# Altium PCB boost.PcbDoc
Units mm, origin at the board's own origin, x right, y up, seen from the top; angles counter-clockwise.
Board outline 50.04 x 50.04 mm, 2 copper layers (Top Layer, Bottom Layer); 27 components, 16 nets, 93 pads, 33 vias.
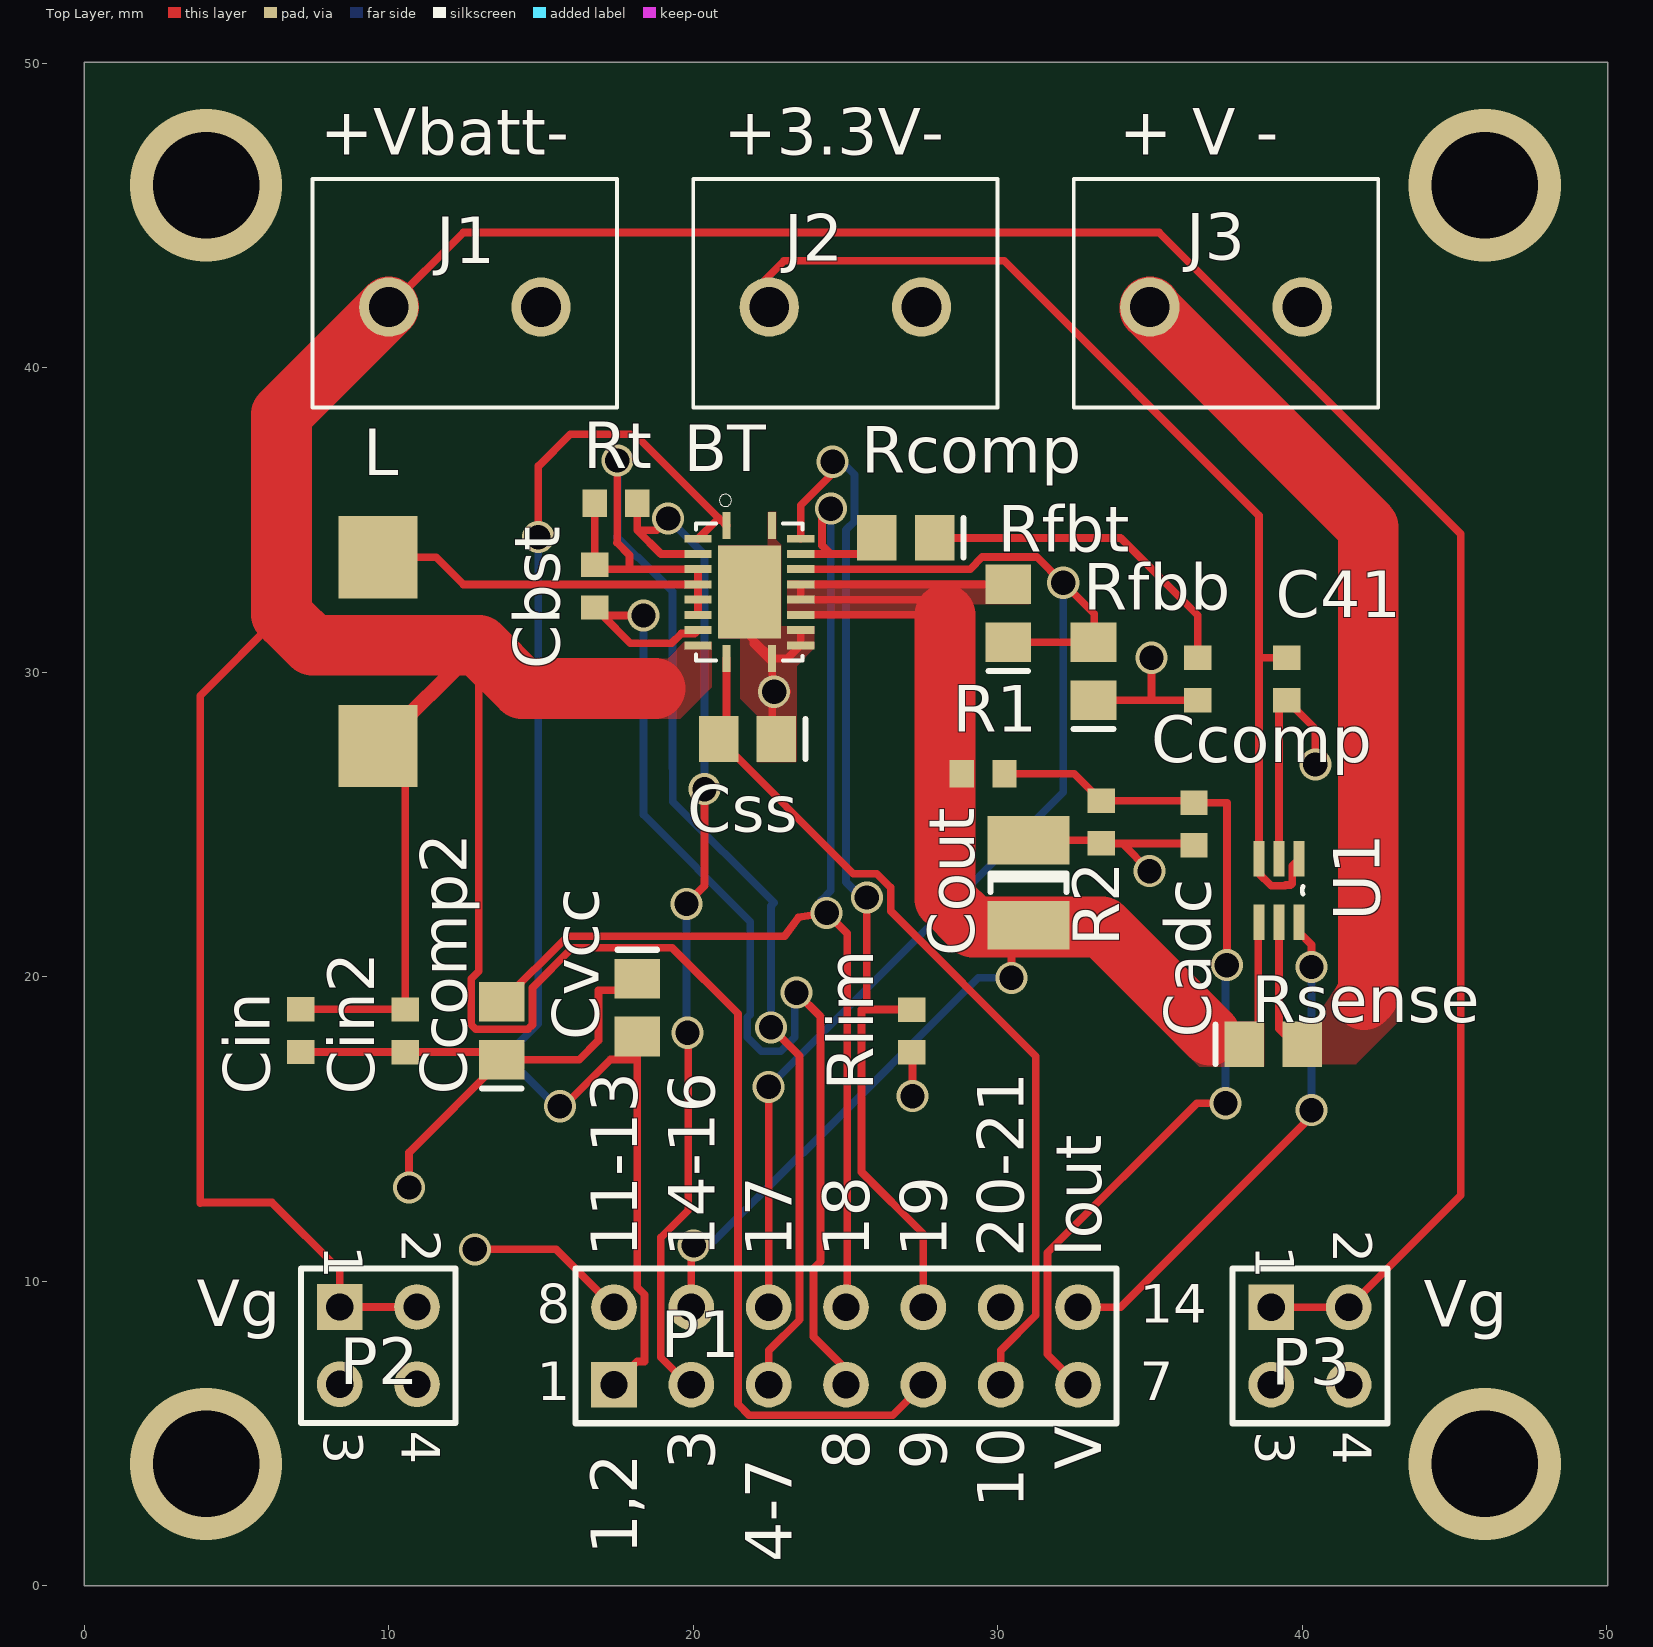
[diagram p0: Top Layer view]
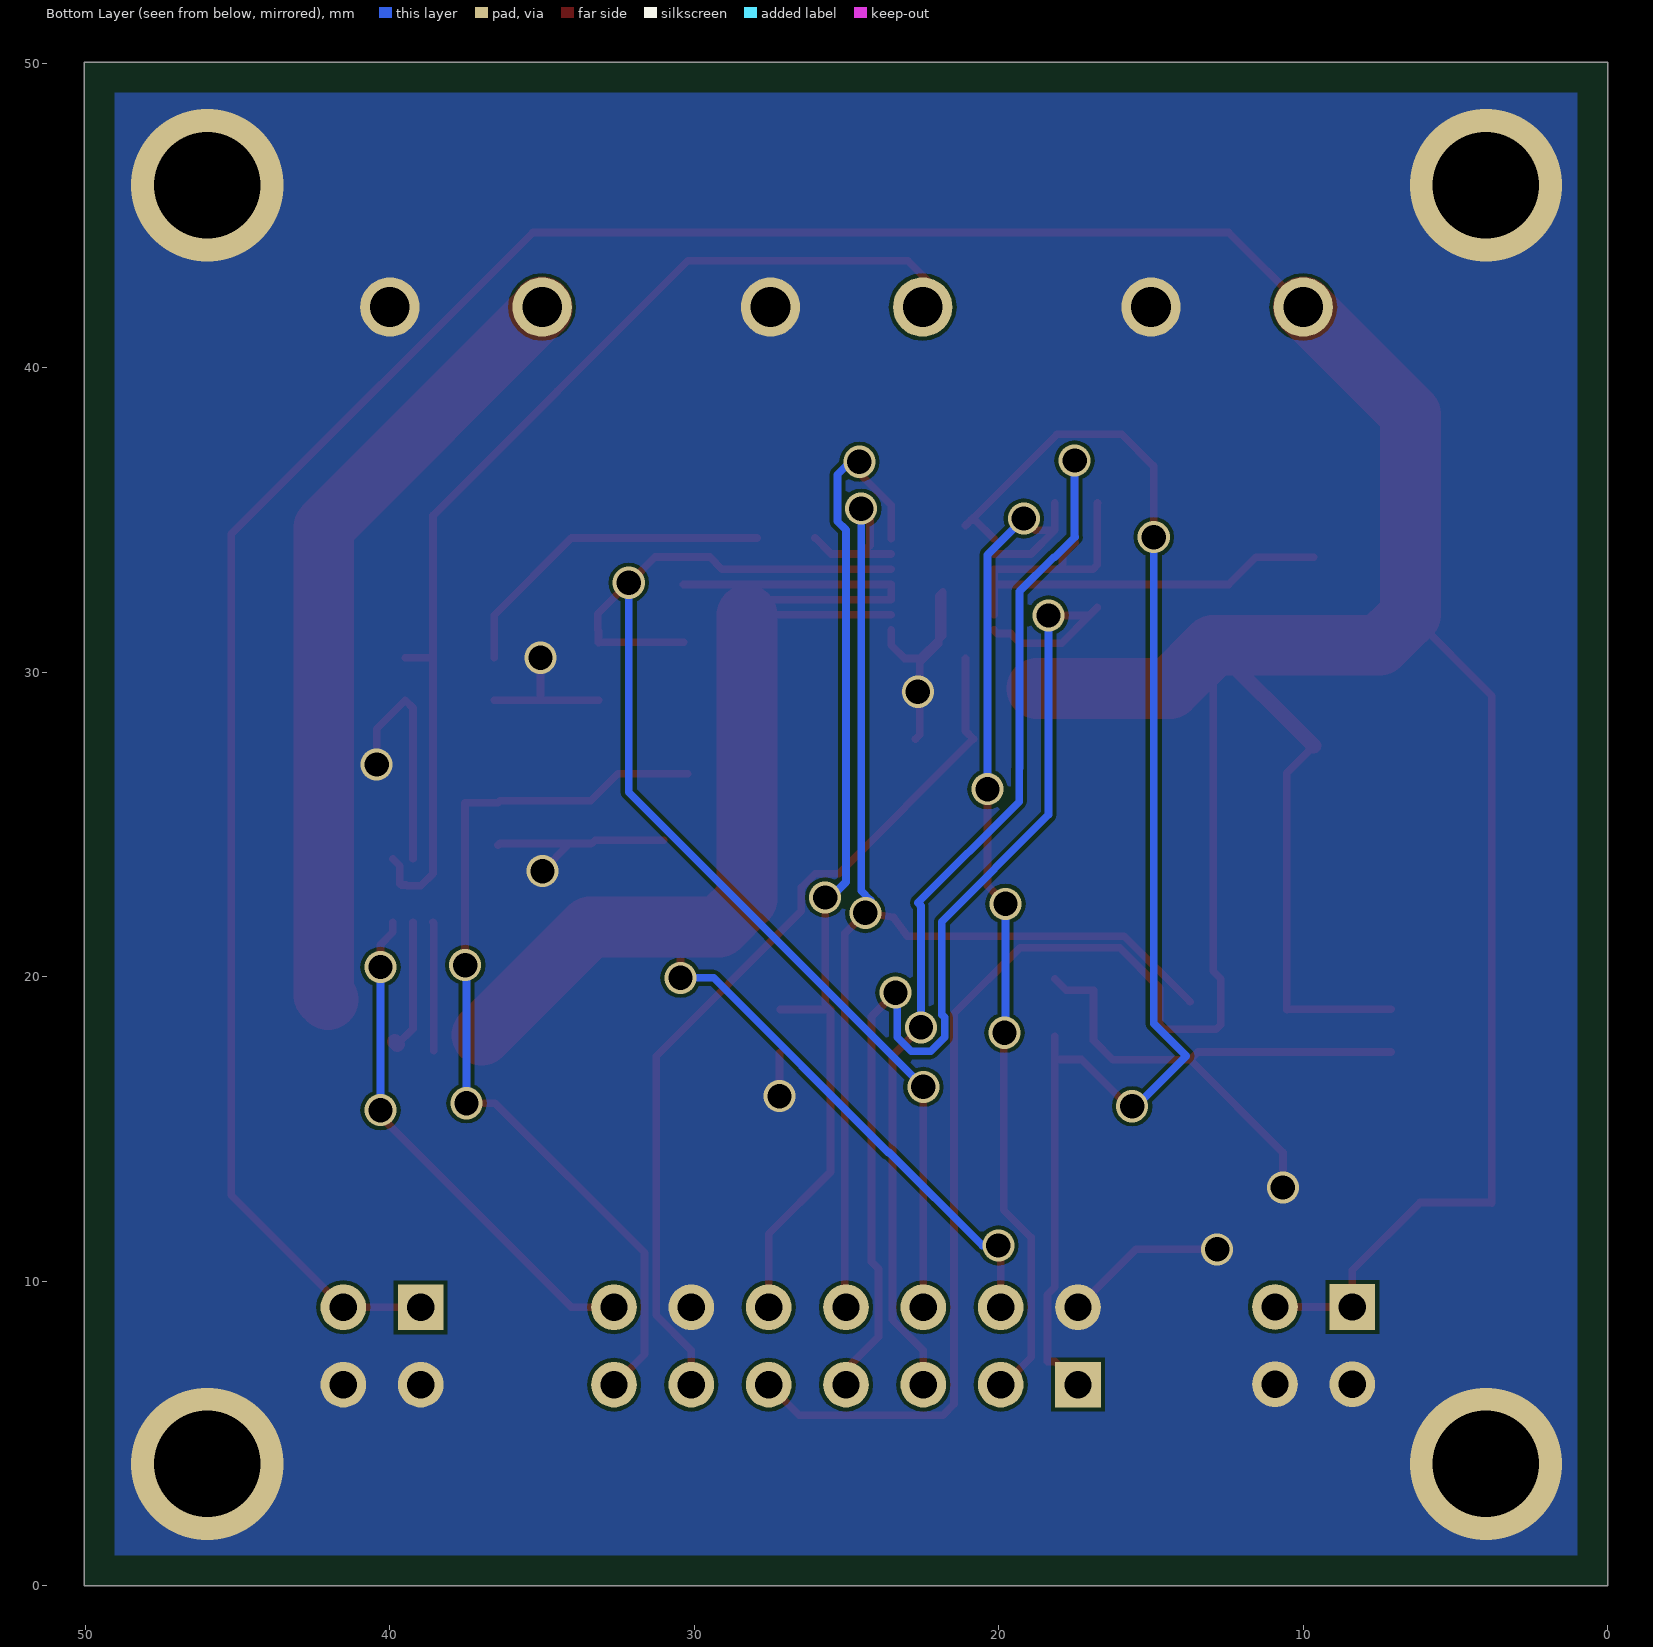
[diagram p1: Bottom Layer view, seen from below]

## Layer stack, top to bottom
Top Solder: solder mask 0.0102, Solder Resist, Dk 3.5
Top Layer: signal copper 0.0356
Dielectric 1: dielectric 0.32, FR-4, Dk 4.8
Bottom Layer: signal copper 0.0356
Bottom Solder: solder mask 0.0102, Solder Resist, Dk 3.5

## Board outline
0,0 0,50.038 50.038,50.038 50.038,0

## Design rules (kind name [scope] priority, off if disabled: settings)
AssemblyTestPointUsage [All] p1 off:
AssemblyTestpoint [All] p1 off: testpointundercomponent=TRUE minsize=1.016 maxsize=2.54 preferedsize=1.524 minholesize=0 maxholesize=1.016 preferedholesize=0.813 testpointgrid=0.025 usegrid=TRUE gridtolerance=0 allowsidetop=TRUE allowsidebottom=TRUE
Clearance [All] p1: gap=0.127 ignorepadtopadclearanceinfootprint=FALSE except(0: Arc-Hole Track-Hole SMDPad-Hole THPad-Hole Via-Hole Fill-Hole Poly-Hole Region-Hole Text-Hole)
FabricationTestPointUsage [All] p1 off: valid=0 allowmultiple=FALSE
FabricationTestpoint [All] p1 off: side=3 testpointundercomponent=FALSE minsize=1.016 maxsize=2.54 preferedsize=1.524 minholesize=0 maxholesize=1.016 preferedholesize=0.813 testpointgrid=0.025 allowsidetop=TRUE allowsidebottom=TRUE usegrid=TRUE gridtolerance=0
HoleSize [All] p1: absolutevalues=TRUE maxlimit=6.35 minlimit=0.203 maxpercent=80.000 minpercent=20.000
MinimumAnnularRing [All] p1: minimumring=0.127
MinimumSolderMaskSliver [All] p1: minsoldermaskwidth=0.102
PlaneConnect [All] p1: planeconnectstyle=Direct reliefexpansion=0.508 reliefentries=4 reliefconductorwidth=0.254 reliefairgap=0.254
PolygonConnect [All] p1: connectstyle=Direct reliefconductorwidth=0.254 reliefentries=4 polygonreliefangle="90 Angle" airgapwidth=0.254
RoutingVias [All] p1: holewidth=0.254 width=0.559 viastyle="Through Hole" minholewidth=0.254 minwidth=0.559 maxholewidth=12.7 maxwidth=12.7
SilkToSilkClearance [All] p1: silktosilkclearance=0
SilkToSolderMaskClearance [IsPad] p1: minsilkscreentomaskgap=0.076 clearancetoexposedcopper=TRUE
SolderMaskExpansion [All] p1: expansion=0.102
Width [All] p1: maxlimit=254 minlimit=0.152 preferedwidth=0.254
21 further rules are at their usual default settings.

## Components (designator, comment, footprint, x,y, rotation, side; value= is the part's Value field where it differs from the comment)
BT "TPS61088" QFN50P450X350X100-21N 21.844,32.639 r0 top
C41 "Cap Semi" 1608[0603] 39.497,29.783 r90 top value=0.1uF
Cadc "" 1608[0603] 36.449,25.019 r270 top value=0.1µF
Cbst "" 1608[0603] 16.764,32.831 r270 top value=100nF
Ccomp "" 1608[0603] 36.576,29.78 r90 top value=470pF
Ccomp2 "" 0805 13.716,18.227 r90 top value=22pF
Cin "" 1608[0603] 7.112,18.23 r90 top value=47µF
Cin2 "" 1608[0603] 10.541,18.227 r90 top value=100nF
Cout "" 1210 31.013,23.089 r270 top value=100µF
Css "8.2nF" 0805 21.783,27.813 r180 top
Cvcc "" 0805 18.161,18.989 r270 top value=2.2µF
J1 "691102710002" 691102710002 12.5,42 r0 top
J2 "691102710002" 691102710002 25,42 r0 top
J3 "691102710002" 691102710002 37.5,42 r0 top
L "" 2-SMD 9.652,30.682 r90 top value=600nH
P1 "Header 7X2A" HDR2X7_CEN 17.399,6.604 r0 top
P2 "Header 2X2" HDR2X2 8.387,9.155 r270 top
P3 "Header 2X2" HDR2X2 38.989,9.144 r270 top
R1 "" 1608[0603] 29.526,26.67 r180 top value=100kO
R2 "" 1608[0603] 33.401,25.081 r90 top value=100kO
Rcomp "" 0805 26.985,34.417 r180 top value=44.2kO
Rfbb "" 0805 33.147,30.033 r90 top value=69.8kO
Rfbt "" 0805 30.353,31.938 r90 top value=220kO
Rlim "" 1608[0603] 27.178,18.223 r90 top value=105kO
Rsense "10mΩ 1/2W 0805" 0805 39.054,17.78 r0 top value=10mO
Rt "RtA1" 1608[0603] 17.461,35.56 r0 top value=267kO
U1 "INA214" SOT65P210X110-6N 39.243,22.835 r270 top

## Footprints (in the part's own frame and the unit in brackets; to place one, negate y for a bottom-side part, rotate by r counter-clockwise, add the part's x,y. Pads: shape width x height; smd on the part's side, far side on the other; paste and mask are expansions set on the pad)
2-SMD [mm]
  rect 2.7x2.6 smd: 1(-3.1,0) 2(3.1,0)
0805 [mm] "Chip Capacitor; Body 2.0 x 1.2 mm (LxW typ)"
  rect 1.3x1.5 smd: 1(-0.95,0) 2(0.95,0)
  silkscreen extent -1.9,-0.65 -1.9,0.65
1210 [mm] "Chip Capacitor; Body 3.2 x 2.5 mm (LxW typ)"
  rect 1.6x2.7 smd: 1(-1.4,0) 2(1.4,0)
  silkscreen extent -0.3,-1.25 0.3,1.25
1608[0603] [mm] "Chip Capacitor, Body 1.6x0.8mm, IPC High Density"
  rect 0.8x0.9 smd: 1(-0.7,0) 2(0.7,0)
  body extent -0.87,-0.48 0.87,0.48, height 1.3
691102710002 [mm]
  round 1.95 hole 1.3: 1(-2.5,0) 2(2.5,0)
  silkscreen extent -5,-3.3 5,4.2
HDR2X2 [mm] "Connector; Header; 2x2 Position"
  rect 1.5x1.5 hole 0.9: 1(0,0)
  round 1.5 hole 0.9: 2(0,2.54) 3(2.54,0) 4(2.54,2.54)
  silkscreen extent -1.27,-1.27 3.81,3.81
HDR2X7_CEN [mm] "Connector; Header; 7x2 Position"
  rect 1.5x1.5 hole 0.9: 1(0,0)
  round 1.5 hole 0.9: 2(2.54,0) 3(5.08,0) 4(7.62,0) 5(10.16,0) 6(12.7,0) 7(15.24,0) 8(0,2.54) 9(2.54,2.54) 10(5.08,2.54) 11(7.62,2.54) 12(10.16,2.54) 13(12.7,2.54) 14(15.24,2.54)
  silkscreen extent -1.27,-1.27 16.51,3.81
QFN50P450X350X100-21N [mm]
  rect 0.26x0.9 smd: 1(-0.75,2.185) 10(-0.75,-2.185) 11(0.75,-2.185) 20(0.75,2.185)
  rect 0.9x0.26 smd: 2(-1.685,1.75) 3(-1.685,1.25) 4(-1.685,0.75) 5(-1.685,0.25) 6(-1.685,-0.25) 7(-1.685,-0.75) 8(-1.685,-1.25) 9(-1.685,-1.75) 12(1.685,-1.75) 13(1.685,-1.25) 14(1.685,-0.75) 15(1.685,-0.25) 16(1.685,0.25) 17(1.685,0.75) 18(1.685,1.25) 19(1.685,1.75)
  rect 2.07x3.07 smd: 21(0,0)
  silkscreen extent -1.75,-2.25 1.75,3.21
SOT65P210X110-6N [mil]
  rect 46x14 smd: 1(-41,26) 2(-41,0) 3(-41,-26) 4(41,-26) 5(41,0) 6(41,26)
  silkscreen extent -5,30 5,31

## Part data
BT: "Boost converter"
C41: "Capacitor (Semiconductor SIM Model)", LatestRevisionDate=29-May-2009, LatestRevisionNote="IPC-7351 Footprint Added.", PackageDescription="Chip Capacitor", PackageReference=C1206, Published=8-Jun-2000, Publisher="Altium Limited"
Cadc Cbst Ccomp Ccomp2 Cin Cin2 Cout Css Cvcc: library part Cap, "Capacitor", LatestRevisionDate=17-Jul-2002, LatestRevisionNote="Re-released for DXP Platform.", PackageDescription="Radial Cap, Thru-Hole; 2 Leads; 0.3 in Pin Spacing", PackageReference=RAD-0.3, Published=8-Jun-2000, Publisher="Altium Limited"
J1 J2 J3: "102 Series 5mm Pitch Straight, PCB Terminal Block, Through Hole, 2 Way", Package=None, Availability=Unavailable, MF="Wurth Electronics", MP=691102710002, Price=None, SnapEDA_Link=https://www.snapeda.com/parts/691102710002/Wurth%20Electronics%20Inc/view-part/?ref=snap
L: library part Inductor, "Inductor", Code_IEC=1005, Code_JEITA=0402, LatestRevisionDate=29-May-2009, LatestRevisionNote="IPC-7351 Footprint Added.", PackageDescription="Chip Inductor", PackageReference=0402-A, Published=8-Jun-2000, Publisher="Altium Limited"
P1: "Header, 7-Pin, Dual row", LatestRevisionDate=17-Jul-2002, LatestRevisionNote="Re-released for DXP Platform.", Publisher="Altium Limited"
P2 P3: "Header, 2-Pin, Dual row", LatestRevisionDate=17-Jul-2002, LatestRevisionNote="Re-released for DXP Platform.", Publisher="Altium Limited"
R1 R2 Rcomp Rfbb Rfbt Rlim Rsense Rt: library part Res2, "Resistor", LatestRevisionDate=17-Jul-2002, LatestRevisionNote="Re-released for DXP Platform.", PackageDescription="Axial Device, Thru-Hole; 2 Leads; 0.4 in Pin Spacing", PackageReference=AXIAL-0.4, Published=8-Jun-2000, Publisher="Altium Limited"
U1: "Current monitor", Supplier Part Number 1=296-38956-6-ND, Supplier 1=Digi-Key

## Via types
v1: diameter 1.054, hole 0.8, Top Layer to Bottom Layer, 29 vias
v2: diameter 5/5 (per signal layer), hole 3.5, Top Layer to Bottom Layer, 4 vias

## Nets (pads, with @x,y where several pads share a name; then routed paths per layer and width w, separated by ;. In a path a pad name is that pad's centre, name@x,y a point inside that pad or via, vN(x,y) a via of type N, cw(c..) or ccw(c..) an arc to the next point about the centre after c; other vN are vias at no path point)
+3V3: C41.2 J2.1 U1.1 U1.3 | length 35.7
  Top Layer w0.254: J2.1@21.757,42.291 22.986,43.52 30.216,43.52 34.492,39.244 34.492,39.242 38.583,35.152 38.583,30.48 ; C41.2 38.586,30.483 38.583,30.48 ; U1.1 39.675,23.647 39.675,23.065 39.622,23.012 39.463,23.012 39.437,22.987 38.989,22.987 38.583,23.393 U1.3 38.583,30.48
+5V: J3.1 Rsense.2 U1.5 | length 30.1
  Top Layer w0.254: U1.5 39.243,18.291 Rsense.2@39.754,17.78
  Top Layer w0.508: Rsense.2@39.754,17.78 Rsense.2@39.837,17.863
  Top Layer w2: J3.1 35,41.941 42.173,34.768 42.173,19.395 42.037,19.258
D1: BT.1 BT.2 Cvcc.2 P1.1 | length 46.4
  Top Layer w0.254: v1(14.91,34.442) 14.91,36.779 14.917,36.772 15.966,37.821 18.085,37.821 20.838,35.068 20.771,35.001 ; v1(15.621,15.748) 15.748,15.748 17.281,17.281 18.161,17.281 ; P1.1 18.161,7.366 18.403,7.366 18.403,9.56 18.161,9.802 18.161,17.281 ; Cvcc.2 18.161,17.281 ; BT.2 20.771,35.001 ; BT.1 20.917,35.001 20.771,35.001
  Bottom Layer w0.254: v1(14.91,34.442) 14.91,18.466 13.843,17.399 15.494,15.748 v1(15.621,15.748)
D2: BT.3 P1.2 Rt.2 | length 35.7
  Top Layer w0.254: Rt.2 18.161,34.671 ; v1(19.177,35.052) 18.796,34.671 18.161,34.671 ; v1(19.779,22.397) 20.371,22.989 v1(20.371,26.162) ; v1(19.812,18.161) 19.837,18.136 19.837,12.337 18.935,11.434 18.935,7.505 19.836,6.604 P1.2 ; BT.3 18.943,33.889 18.161,34.671 ; v1(20.371,26.162) 20.371,26.533 20,26.162 v1(20.371,26.162)
  Bottom Layer w0.254: v1(19.177,35.052) 20.371,33.858 v1(20.371,26.162) ; v1(19.779,22.397) 19.779,18.194 v1(19.812,18.161)
D3: BT.4 BT.5 BT.6 BT.7 Cbst.1 L.2 P1.3 Rt.1 | length 55
  Top Layer w0.254: L.2 11.557,33.782 12.45,32.889 BT.5 ; Rt.1 16.764,35.557 Cbst.1 16.906,33.389 17.907,33.389 ; v1(17.511,36.959) 17.507,36.955 17.507,34.261 17.501,34.254 17.907,33.848 17.907,33.389 ; BT.7 BT.6 BT.5 ; P1.3 22.479,7.724 23.495,8.74 23.495,17.399 v1(22.555,18.339) v1@22.606,18.339 ; 17.907,33.389 BT.4 BT.5
  Bottom Layer w0.254: v1(17.511,36.959) 17.511,34.453 17.501,34.442 18.161,33.782 18.198,33.782 19.323,32.657 19.323,26.852 19.329,26.846 19.329,25.756 22.657,22.428 22.555,22.327 v1(22.555,18.339)
D4: BT.8 Cbst.2 P1.4 | length 37.9
  Top Layer w0.254: Cbst.2 Cbst.2@17.026,31.869 ; v1(18.369,31.869) Cbst.2@17.026,31.869 ; BT.8 20.043,31.273 19.604,31.273 19.288,30.957 17.938,30.957 Cbst.2@17.026,31.869 ; v1(23.393,19.482) 24.181,18.694 24.181,10.643 23.952,10.414 23.952,8.788 23.952,8.179 25.019,7.112 P1.4
  Bottom Layer w0.254: v1(18.369,31.869) 18.369,25.319 21.876,21.812 21.876,18.764 21.774,18.662 21.774,18.015 22.232,17.558 22.879,17.558 23.336,18.015 23.336,19.425 v1(23.393,19.482)
D5: BT.9 Cin2.2 Cin.2 J1.1 L.1 P1.5 P2.1 P2.2 P3.1 P3.2 | length 185.4
  Top Layer w0.254: 6.477,31.902 3.81,29.235 3.81,12.573 3.821,12.584 6.166,12.584 8.387,10.362 P2.1 P2.2 10.962,9.155 P2.2@11.024,9.093 ; Cin.2 10.538,18.93 Cin2.2 10.541,26.693 L.1 ; J1.1 12.446,44.446 35.31,44.446 45.212,34.544 45.212,12.827 P3.2 P3.1 38.76,9.144 P3.1@38.583,9.322 ; 12.959,30.889 12.959,20.179 12.712,19.932 12.712,18.422 12.861,18.273 14.571,18.273 14.72,18.422 14.72,19.642 16.033,20.955 19.304,20.955 21.475,18.784 21.475,5.957 21.832,5.6 26.555,5.6 P1.5
  Top Layer w0.508: L.1 12.959,30.889
  Top Layer w2: 6.477,31.902 6.477,38.477 J1.1 ; 6.629,31.75 7.49,30.889 12.959,30.889 14.379,29.469 18.739,29.469
D6: BT.10 Css.2 P1.6 | length 29.2
  Top Layer w0.254: BT.10 21.094,28.074 Css.2 25.259,23.387 26.028,23.387 26.486,22.929 26.486,22.16 31.254,17.392 31.254,8.879 30.099,7.724 P1.6
D8: BT.11 BT.12 BT.13 BT.20 BT.21 C41.1 Cadc.2 Ccomp2.1 Ccomp.1 Cin2.1 Cin.1 Cout.1 Css.1 Cvcc.1 J1.2 J2.2 J3.2 P1.8 P1.13 P2.3 P2.4 P3.3 P3.4 R2.1 Rfbb.1 Rlim.1 U1.2 | length 55.5
  Top Layer w0.254: Cin.1 10.538,17.53 Cin2.1 13.466,17.527 Ccomp2.1 ; v1(10.668,13.081) 10.668,14.229 Ccomp2.1 ; v1(12.827,11.049) 15.494,11.049 P1.8 ; Cvcc.1 17.78,19.558 16.891,19.558 16.891,17.911 16.257,17.277 Ccomp2.1 ; v1(22.657,29.362) 23.089,29.362 v1@22.594,29.857 ; Css.1 22.594,27.952 v1@22.594,29.857 ; BT.13 BT.12 23.094,30.454 BT.11 ; Rlim.1 27.203,17.498 v1(27.203,16.078) ; Cout.1 33.246,24.489 R2.1@33.35,24.384 ; Rfbb.1 33.15,29.08 35.052,29.08 ; R2.1@33.398,24.384 R2.1 34.09,24.381 ; v1@35.001,23.47 34.09,24.381 ; v1(35.052,30.48) 35.052,29.08 ; Cadc.2 36.387,24.381 34.09,24.381 ; Ccomp.1 35.052,29.08 ; U1.2 39.243,28.829 C41.1 40.437,28.143 v1(40.437,26.975) ; 21.971,31.077 21.971,30.937 BT.11@22.594,30.314 ; 21.971,31.077 BT.11 ; 21.971,31.077 21.844,31.204 BT.21 21.971,32.512 21.971,31.077 ; v1@22.594,29.857 BT.11@22.594,30.314 ; BT.11@22.594,30.314 BT.11
  other v1: 34.986,23.472
  other v2: 4,4 46,4 4,46 46,46
D9: BT.14 BT.15 BT.16 Cout.2 P1.9 R1.2 Rfbt.2 Rsense.1 U1.4 | length 61.2
  Top Layer w0.254: P1.9 v1@19.939,11.125 ; v1@20.015,10.846 v1(20.015,11.176) ; BT.14 28.27,31.889 ; 27.549,32.389 BT.15 BT.16 23.53,32.888 Rfbt.2 ; v1(30.455,19.964) 30.455,21.361 Cout.2@30.505,21.412 ; Rsense.1@38.557,17.577 38.557,21.768 U1.4
  Top Layer w0.508: Cout.2@30.334,21.584 33.483,21.584
  Top Layer w2: 28.27,31.889 28.27,22.555 29.185,21.641 33.426,21.641 33.483,21.584 36.982,18.085
  Bottom Layer w0.254: v1(20.015,11.176) 20.542,11.176 23.606,14.24 23.622,14.224 29.362,19.964 v1(30.455,19.964)
D10: BT.17 P1.10 Rfbb.2 Rfbt.1 | length 42.1
  Top Layer w0.254: P1.10 v1(22.479,16.383) ; BT.17 29.095,33.389 29.498,33.792 31.283,33.792 v1@32.131,32.944 ; Rfbt.1 Rfbb.2@33.142,30.988 ; v1(32.156,32.944) 33.172,31.928 33.172,31.394 33.147,31.369 Rfbb.2
  Bottom Layer w0.254: v1(22.479,16.383) 32.156,26.06 v1(32.156,32.944)
D11: BT.18 Ccomp2.2 P1.11 Rcomp.2 | length 43.3
  Top Layer w0.254: Ccomp2.2 15.875,21.336 23.01,21.336 23.458,21.952 v1(24.384,22.098) 25.06,21.422 25.06,9.185 P1.11 ; BT.18 24.511,33.889 ; v1(24.521,35.379) 24.374,35.379 24.233,35.238 24.233,34.167 24.511,33.889 ; Rcomp.2 25.507,33.889 24.511,33.889
  Bottom Layer w0.254: v1(24.384,22.098) 24.511,22.225 24.217,22.519 24.521,22.823 v1(24.521,35.379)
D12: BT.19 P1.12 Rlim.2 | length 34.4
  Top Layer w0.254: BT.19 23.529,35.492 24.646,36.609 24.578,36.677 v1(24.578,36.918) ; v1(25.705,22.606) 25.705,19.101 25.527,18.923 ; Rlim.2 25.527,18.923 ; P1.12 27.559,11.557 25.527,13.589 25.527,18.923
  Bottom Layer w0.254: v1(24.578,36.918) 24.874,36.918 25.302,36.491 25.302,34.961 25.019,34.679 25.019,23.114 25.609,22.524 25.691,22.606 v1(25.705,22.606)
Iout: P1.14 U1.6 | length 16.8
  Top Layer w0.254: P1.14 34.036,9.144 40.31,15.418 v1(40.31,15.621) ; U1.6 39.903,21.463 40.31,21.057 v1(40.31,20.32)
  Bottom Layer w0.254: v1(40.31,15.621) v1(40.31,20.32)
NetCcomp_2: Ccomp.2 Rcomp.1 | length 11.1
  Top Layer w0.254: Rcomp.1 34.036,34.417 36.576,31.877 Ccomp.2
Vout: Cadc.1 P1.7 R1.1 R2.2 | length 30.2
  Top Layer w0.254: R1.1 32.512,26.67 R2.2 36.387,25.781 Cadc.1 37.53,25.719 v1(37.53,20.385) ; P1.7 31.635,7.608 31.635,10.934 36.549,15.848 v1(37.483,15.848)
  Bottom Layer w0.254: v1(37.483,15.848) 37.483,20.338 v1(37.53,20.385)

## Polygon pours and split planes (outlines as drawn)
D9 on Top Layer "D9_NET" (solid, pour order 18): 38.76,18.517 38.76,17.069 38.735,17.043 36.627,17.043 35.814,17.856 36.474,18.517
D8 on Top Layer "GND" (solid, pour order 16): 22.479,35.281 22.733,35.281 22.733,34.392 22.708,34.366 22.885,34.188 22.885,31.547 22.911,31.521 23.978,31.521 23.978,30.785 23.393,30.201 23.393,27.076 23.368,27.051 22.098,27.051 22.098,28.575 21.539,29.134 21.539,31.115 20.803,31.115 20.828,31.14 20.828,34.163 22.428,34.163 22.454,34.188 22.454,35.255
D9 on Top Layer "D9_Pour" (solid, pour order 12): 23.089,31.775 27.788,31.775 27.813,31.75 28.296,32.233 31.039,32.233 31.09,32.283 31.09,33.02 23.089,33.02
+5V on Top Layer "+5V-Pour" (solid, pour order 10): 40.037,18.008 40.034,18.005 39.488,18.005 39.488,17.185 39.466,17.143 39.451,17.12 40.243,17.12 41.783,17.12 41.783,17.145 43.131,18.493 43.131,19.687 41.146,19.687
D5 on Top Layer "Vg" (solid, pour order 6): 19.714,31.002 19.163,30.452 18.706,30.452 18.706,28.478 18.714,28.47 18.723,28.478 19.578,28.478 20.611,29.512 20.611,30.985 19.731,30.985
D8 on Bottom Layer "D8_L02_P004" (solid, pour order 4): 1,49.038 1,1 49.038,1 49.038,49.038

## Silkscreen, mask and mechanical layers (free items; w line width, h text height)
Top Overlay:
  text "+Vbatt-" at 7.747,47 h1.52
  text "+3.3V-" at 21,47 h1.52
  text "+ V -" at 34,47 h1.52
  text "11-13" at 18.161,10.795 h1.52 r90
  text "14-16" at 20.701,10.795 h1.52 r90
  text "17" at 23.241,10.795 h1.52 r90
  text "18" at 25.781,10.795 h1.52 r90
  text "19" at 28.321,10.795 h1.52 r90
  text "20-21" at 30.861,10.795 h1.52 r90
  text "Iout" at 33.401,10.795 h1.52 r90
  text "Vg" at 3.688,8.52 h1.52
  text "Vg" at 44,8.5 h1.52
  text "3" at 20.701,3.81 h1.52 r90
  text "8" at 25.781,3.81 h1.52 r90
  text "9" at 28.321,3.81 h1.52 r90
  text "V" at 33.401,3.81 h1.52 r90
  text "10" at 30.861,2.54 h1.52 r90
  text "1,2" at 18.161,1.016 h1.52 r90
  text "4-7" at 23.241,0.762 h1.52 r90

## Text inside footprints (layer, text, board x,y; h text height)
J1: Mechanical 1 "1" at 8.844,39.346 h1.88
J2: Mechanical 1 "1" at 21.344,39.346 h1.88
J3: Mechanical 1 "1" at 33.844,39.346 h1.88
P1: Top Overlay "8" at 14.859,8.636 h1.27; Top Overlay "1" at 14.859,6.096 h1.27; Top Overlay "7" at 34.671,6.096 h1.27; Top Overlay "14" at 34.671,8.636 h1.27
P2: Top Overlay "1" at 7.879,11.187 h1.27 r270; Top Overlay "2" at 10.419,11.695 h1.27 r270; Top Overlay "4" at 10.419,5.091 h1.27 r270; Top Overlay "3" at 7.879,5.091 h1.27 r270
P3: Top Overlay "1" at 38.481,11.176 h1.27 r270; Top Overlay "2" at 41.021,11.684 h1.27 r270; Top Overlay "4" at 41.021,5.08 h1.27 r270; Top Overlay "3" at 38.481,5.08 h1.27 r270